# Altium PCB WUT-4-3-3.PcbDoc (part 2 of 2)
Units mil, origin at the board's own origin, x right, y up, seen from the top; angles counter-clockwise.
Board outline 3346.46 x 2204.72 mil, 4 copper layers (Top Layer, GND Plane, 3V3 Plane, Bottom Layer), stack 30.635 mil thick; 173 components, 315 nets, 1031 pads, 178 vias.
Unrouted connection lines stored in the file: 396.
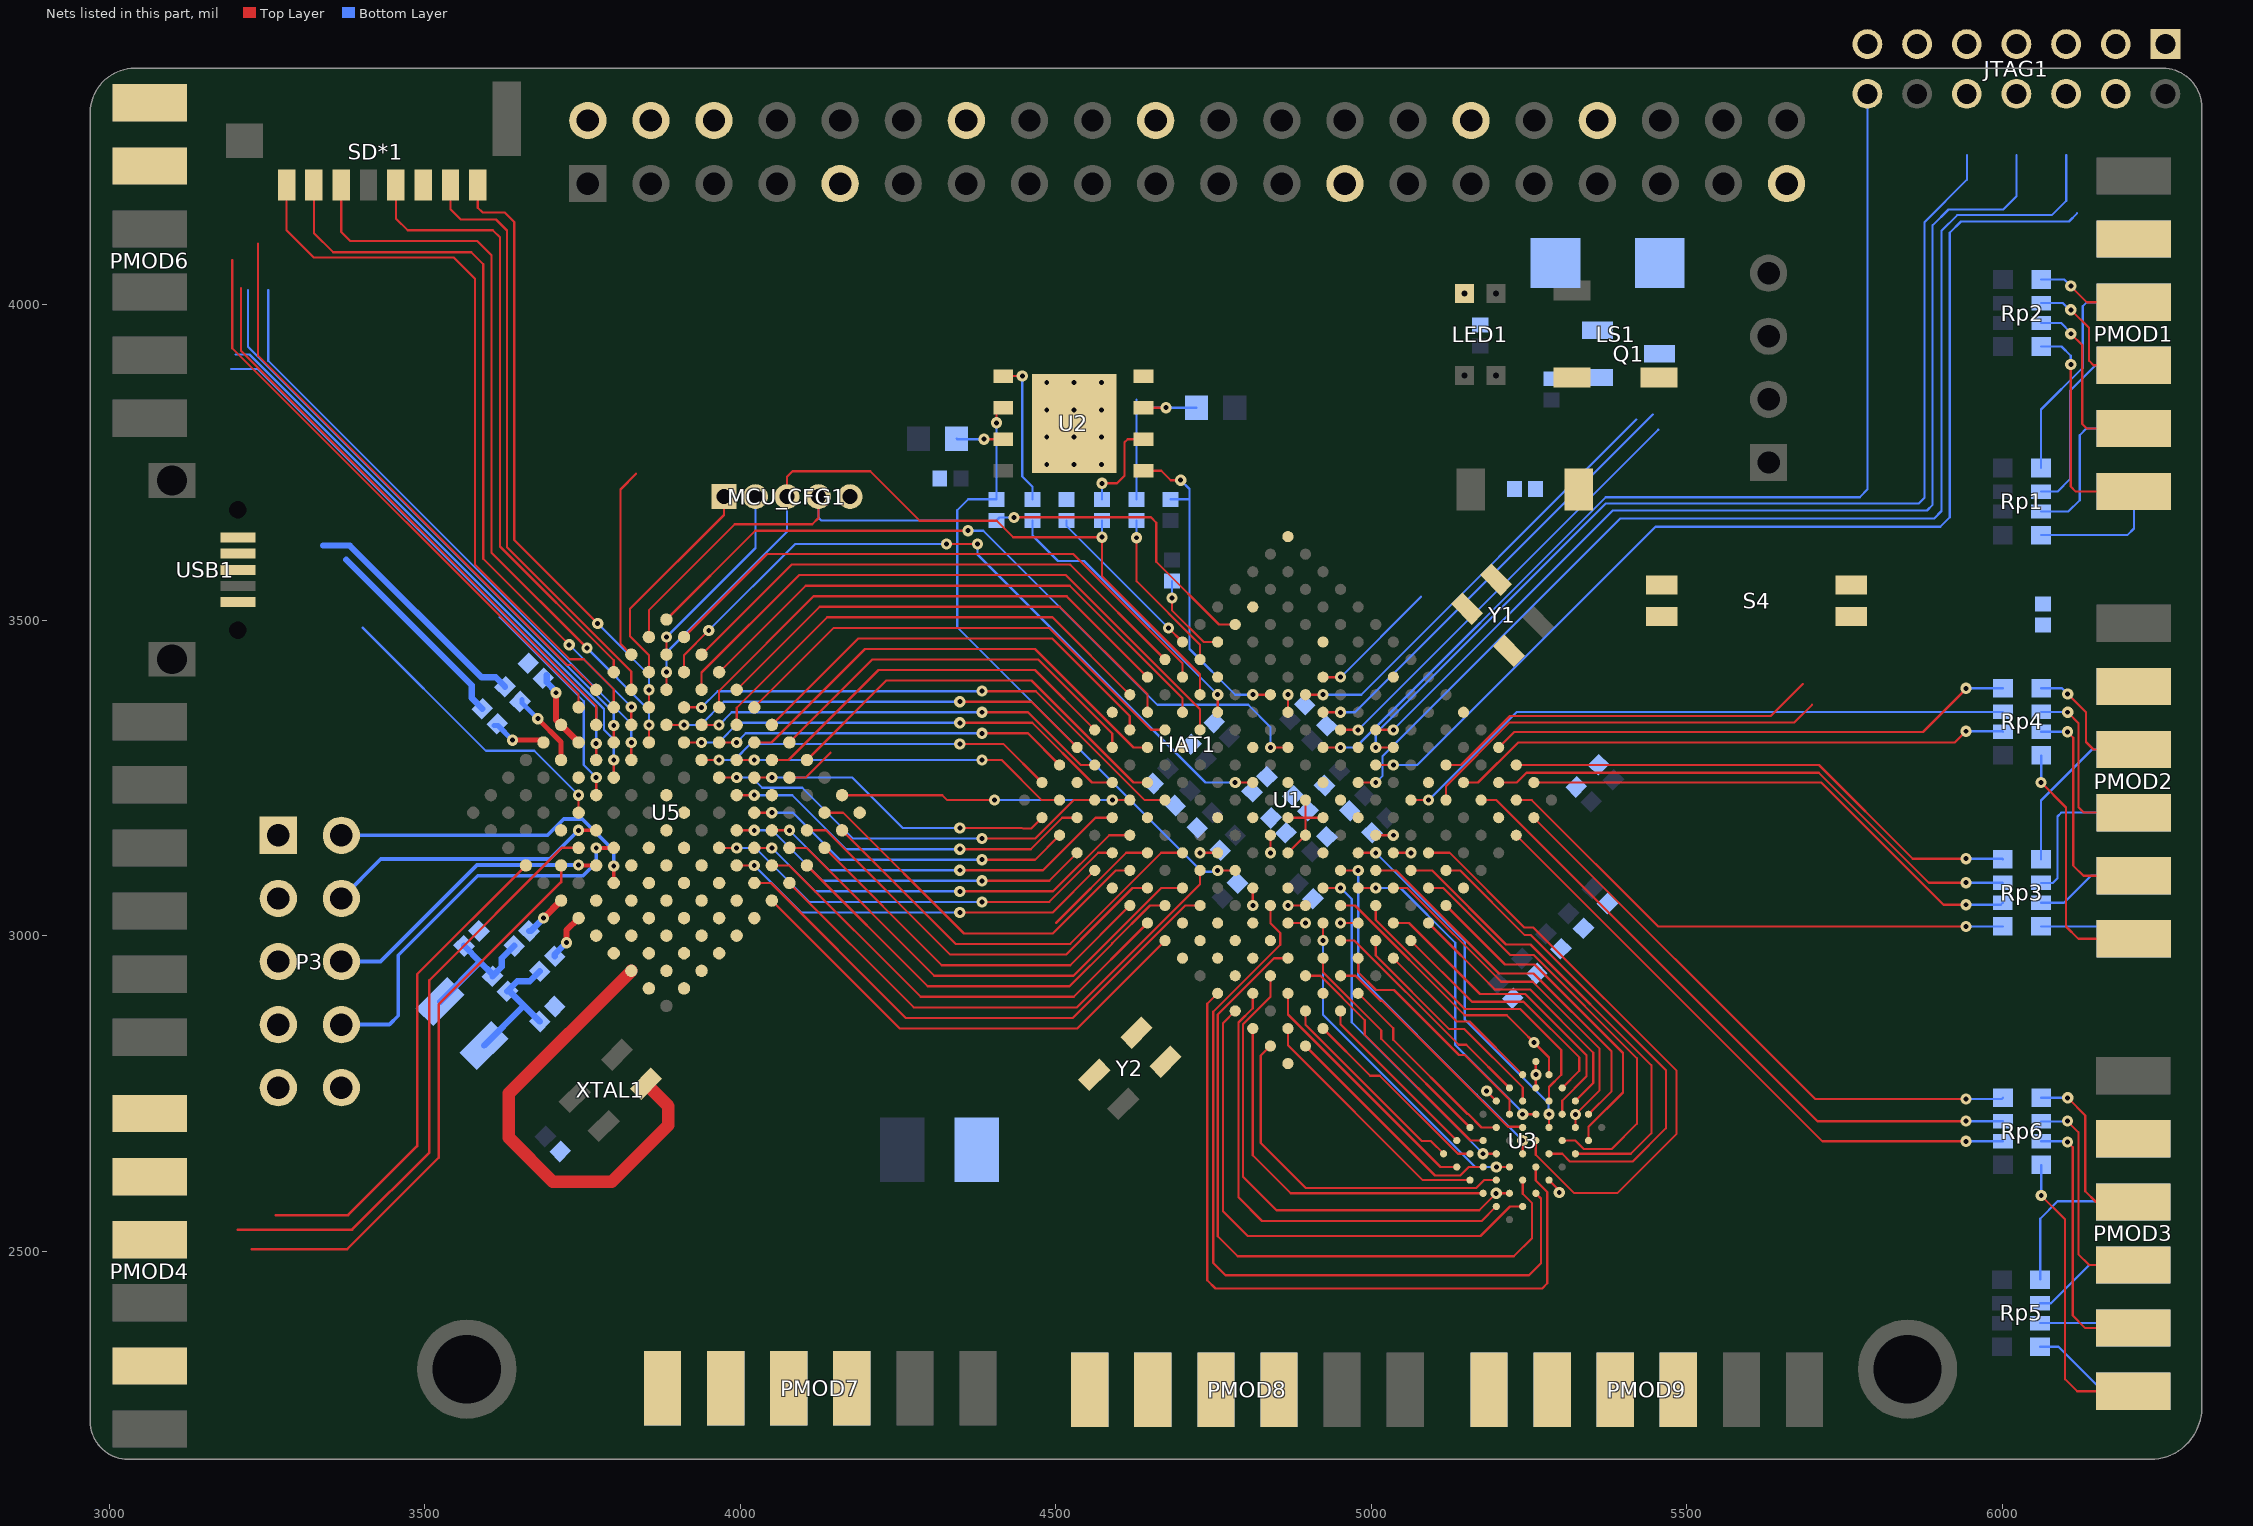
[diagram p4: the nets of this part, all layers, seen from the top]

## Via types
v1: diameter 17.72, hole 7.87, Top Layer to Bottom Layer, tented both sides, 166 vias
v2: diameter 19.68, hole 7.87, Top Layer to Bottom Layer, 12 vias

## Nets (pads, with @x,y where several pads share a name; then routed paths per layer and width w, separated by ;. In a path a pad name is that pad's centre, name@x,y a point inside that pad or via, vN(x,y) a via of type N, cw(c..) or ccw(c..) an arc to the next point about the centre after c; other vN are vias at no path point) (continued)
BANK34_IO9: Rp6.6 U1.P1 | length 977.4
  Top Layer w3.5: U1.P1@5230.07,3159.16 5715.23,2674 v1@5943,2674
  Bottom Layer w3.5: v1@5938,2674.1 v1(5943,2674.1) Rp6.6@6001.49,2674.1
BANK34_IO10: Rp4.6 U1.P4 | length 889
  Top Layer w3.5: U1.P4@5146.55,3242.68 5169.45,3242.68 5233.04,3306.27 5925.27,3306.27 v1(5943,3324)
  Bottom Layer w3.5: v1(5943,3324) 6000.59,3324 Rp4.6@6001.49,3323.1
BANK34_IO11: Rp6.7 U1.P3 | length 1044
  Top Layer w3.5: U1.P3@5174.39,3214.84 5198.64,3214.84 5707.48,2706 v1(5943,2706)
  Bottom Layer w3.5: v1@5937,2706 v1(5943,2706) 6001.09,2706 Rp6.7@6001.49,2705.59
BANK34_IO12: Rp4.7 U1.M5 | length 996.3
  Top Layer w3.5: U1.M5@5063.03,3214.84 v1(5090.87,3214.84)
  Bottom Layer w3.5: v1(5090.87,3214.84) 5230.63,3354.59 Rp4.7@6001.49,3354.59
BANK34_IO13: S4.2 U1.N4 | length 655.8
  Top Layer w3.5: U1.N4@5118.71,3214.84 5118.71,3236.91 5219.83,3338.03 5671.03,3338.03 5699,3366
BANK34_IO14: Rp3.5 U1.R2 | length 854.2
  Top Layer w3.5: U1.R2@5230.07,3214.84 5254.53,3214.84 5454.89,3014.48 v1(5943,3014.48)
  Bottom Layer w3.5: v1(5943,3014.48) 6000.96,3014.48 Rp3.5@6001.18,3014.7
BANK34_IO15: Rp6.8 U1.R1 | length 935.2
  Top Layer w3.5: U1.R1@5257.91,3187 5703.9,2741 v1(5943,2741)
  Bottom Layer w3.5: v1@5937,2741 v1(5943,2741) 5999.5,2741 Rp6.8@6001.49,2743
BANK34_IO16: Rp3.7 U1.R3 | length 877.8
  Top Layer w3.5: U1.R3@5202.23,3242.68 5230.73,3242.68 5246.33,3258.29 5709.71,3258.29 5884,3084 v1(5943,3084)
  Bottom Layer w3.5: v1(5943,3084) 6000.77,3084 Rp3.7@6001.18,3083.59
BANK34_IO17: Rp3.6 U1.T2 | length 824.8
  Top Layer w3.5: U1.T2@5257.91,3242.68 5713.51,3242.68 5907.18,3049 v1(5943,3049)
  Bottom Layer w3.5: v1(5943,3049) 5998.08,3049 Rp3.6@6001.18,3052.1
BANK34_IO18: Rp4.8 U1.T4 | length 837.6
  Top Layer w3.5: U1.T4@5202.23,3298.36 5226.71,3322.84 5874.84,3322.84 v1@5943,3391
  Bottom Layer w3.5: v1(5943,3392) Rp4.8@6001.49,3392
BANK34_IO19: Rp3.8 U1.T3 | length 833
  Top Layer w3.5: U1.T3@5230.07,3270.52 5709.98,3270.52 5858.49,3122 v1(5943,3122)
  Bottom Layer w3.5: v1(5943,3122) 6000.17,3122 Rp3.8@6001.18,3121
BANK34_IO20: S4.1 U1.P5 | length 618.5
  Top Layer w3.5: U1.P5@5118.71,3270.52 5142.42,3270.52 5220.17,3348.27 5633.27,3348.27 5684,3399
BANK35_IO1: U1.B7
BANK35_IO2: U1.A7
BANK35_IO3: U1.B6
BANK35_IO4: U1.B5
BANK35_IO5: U1.C7
BANK35_IO6: U1.C6
BANK35_IO7: U1.D6
BANK35_IO8: U1.D5
BANK35_IO9: U1.E5 | length 27.8
  Top Layer w3.5: U1.E5@4868.16,3019.97 v1(4896,3019.97)
BANK35_IO10: U1.K5 | length 27.8
  Top Layer w3.5: U1.K5@5007.36,3159.16 v1(5035.19,3159.16)
CAN0_RX: PMOD8.12 U5.J9
CAN0_TX: PMOD8.11 U5.K9
CLK_OUT: U1.D13 U5.A11 | length 459.3
  Top Layer w3.5: U5.A11@4161.55,3222.68 4320.32,3222.68 4328.16,3214.84 v1(4403.16,3214.84) ; v1(4589.78,3214.84) U1.D13@4617.61,3214.84
  Bottom Layer w3.5: v1(4403.16,3214.84) v1(4589.78,3214.84)
DIN: MCU_CFG1.3 R16.1 U1.J14 U5.C3 | length 1303.4
  Top Layer w3.5: U5.C3@3883.16,3389.71 v1(3883.16,3417.55) ; MCU_CFG1.3@4074.22,3695.84 4074.22,3727.27 4082.93,3735.98 4206.08,3735.98 4284.62,3657.45 4406.88,3657.45 4432.84,3631.49 v1(4573.4,3631.49) 4573.4,3569.41 4728.97,3413.84 U1.J14@4728.97,3381.87
  Bottom Layer w3.5: v1(3883.16,3417.55) 3883.16,3448.91 4074.22,3639.98 MCU_CFG1.3@4074.22,3695.84 ; v1(4573.4,3631.49) R16.1@4573.4,3658.11
DONE: R8.1 R9.2 U1.H10 U5.B3 | length 1177.9
  Top Layer w3.5: U5.B3@3911,3417.55 3911,3444.61 v1(3950.22,3483.84) ; v1(4327.22,3620.84) v1(4376.22,3620.84) ; v1(4784.65,3242.68) U1.H10@4812.48,3242.68
  Bottom Layer w3.5: v1(3950.22,3483.84) 4087.22,3620.84 v1@4323.16,3620.84 ; v1@4320.16,3623.84 v1@4323.16,3620.84 ; v1@4327.16,3616.84 v1@4323.16,3620.84 ; v1(4327.22,3620.84) v1@4323.16,3620.84 ; v1(4376.22,3620.84) 4376.22,3604 4737.54,3242.68 v1(4784.65,3242.68)
FB_AD0: U1.J15 U5.A2 | length 938.4
  Top Layer w3.5: U5.A2@3911,3473.23 4042.61,3604.84 4528.07,3604.84 4701.13,3431.78 U1.J15@4701.13,3409.71
FB_AD1: U1.J16 U5.A3 | length 856.2
  Top Layer w3.5: U5.A3@3938.84,3445.39 4081.57,3588.12 4523.16,3588.12 4523.16,3587.68 U1.J16@4673.29,3437.55
FB_AD2: U1.H14 U5.A4 | length 887.3
  Top Layer w3.5: U5.A4@3966.68,3417.55 4103.82,3554.69 4522.54,3554.69 4701.13,3376.11 U1.H14@4701.13,3354.03
FB_AD3: U1.H13 U5.B4 | length 1002.2
  Top Layer w3.5: U5.B4@3938.84,3389.71 3938.84,3417 4093.25,3571.41 4516.59,3571.41 4728.97,3359.03 U1.H13@4728.97,3326.19
FB_AD4: U1.E12 U5.C4 | length 844.5
  Top Layer w3.5: U5.C4@3911,3361.87 v1(3938.84,3361.87) ; v1(4383.16,3387.54) 4468.62,3387.54 4641.32,3214.84 U1.E12@4673.29,3214.84
  Bottom Layer w3.5: v1(3938.84,3361.87) 3964.5,3387.54 v1(4383.16,3387.54)
FB_AD5: U1.B15 U5.C7 | length 538
  Top Layer w3.5: U5.C7@3994.52,3278.36 v1(4022.36,3278.35) ; v1(4383.16,3278.35) 4414.65,3278.35 4478.16,3214.84 U1.B15@4506.26,3214.84
  Bottom Layer w3.5: v1(4022.36,3278.35) v1(4383.16,3278.35)
FB_AD6: U1.C14 U5.D7 | length 660.6
  Top Layer w3.5: U5.D7@3966.68,3250.52 v1(3994.52,3250.52) ; v1(4383.16,3153.81) 4467.3,3153.81 4528.33,3214.84 U1.C14@4561.93,3214.84
  Bottom Layer w3.5: v1(3994.52,3250.52) 4018.98,3250.52 4035.13,3234.36 4098.64,3234.36 4179.19,3153.81 v1(4383.16,3153.81)
FB_AD7: U1.E15 U5.A8 | length 636.8
  Top Layer w3.5: U5.A8@4078.03,3306.19 4209.52,3437.68 4472.52,3437.68 4589.77,3320.43 U1.E15@4589.77,3298.36
FB_AD8: U1.E16 U5.B8 | length 610.1
  Top Layer w3.5: U5.B8@4050.19,3278.36 4076.68,3278.36 4219.29,3420.97 4467.16,3420.97 U1.E16@4561.93,3326.19
FB_AD9: U1.A15 U5.C8 | length 494.4
  Top Layer w3.5: U5.C8@4022.36,3250.52 v1(4050.19,3250.52) ; v1(4348.16,3170.53) 4446.26,3170.53 ; 4448.16,3169.84 4461.26,3169.84 U1.A15@4478.42,3187
  Bottom Layer w3.5: v1(4050.19,3250.52) 4177.48,3250.52 4257.47,3170.53 v1(4348.16,3170.53)
FB_AD10: U1.B14 U5.D8 | length 595.7
  Top Layer w3.5: U5.D8@3994.52,3222.68 v1(4022.36,3222.68) ; v1(4348.16,3137.1) 4460.49,3137.1 4510.39,3187 U1.B14@4534.1,3187
  Bottom Layer w3.5: v1(4022.36,3222.68) 4082.48,3222.68 4168.06,3137.1 v1(4348.16,3137.1)
FB_AD11: U1.E13 U5.A9 | length 658.7
  Top Layer w3.5: U5.A9@4105.87,3278.36 4231.77,3404.25 4461.8,3404.25 4623.38,3242.68 U1.E13@4645.45,3242.68
FB_AD12: U1.C11 U5.A12 | length 190.9
  Top Layer w3.5: 4500.61,3020.09 4611.85,3131.32 U1.C11@4645.45,3131.32
FB_AD13: U1.B11 U5.B11 | length 604.7
  Top Layer w3.5: U5.B11@4133.71,3194.84 4163.16,3194.84 4354.63,3003.37 4495.43,3003.37 4595.54,3103.48 U1.B11@4617.61,3103.48
FB_AD14: U1.D10 U5.B12 | length 674.4
  Top Layer w3.5: U5.B12@4161.55,3167 4341.89,2986.66 4523.16,2986.66 4523.16,2986.96 4667.52,3131.32 U1.D10@4701.13,3131.32
FB_AD15: U1.B9 U5.D12 | length 700
  Top Layer w3.5: U5.D12@4105.87,3111.32 4297.4,2919.8 4522.04,2919.8 4589.62,2987.37 4589.62,2987.84 4649.58,3047.81 U1.B9@4673.29,3047.81
FB_AD16: U1.A13 U5.E9 | length 591.1
  Top Layer w3.5: U5.E9@3994.52,3167 v1(4022.36,3167) ; v1(4383.16,3086.95) 4489.72,3086.95 U1.A13@4534.1,3131.32
  Bottom Layer w3.5: v1(4022.36,3167) 4051,3167 4131.05,3086.95 v1(4383.16,3086.95)
FB_AD17: U1.C12 U5.E10 | length 660.6
  Top Layer w3.5: U5.E10@4022.36,3139.16 v1(4050.19,3139.16) ; v1(4348.16,3070.24) 4495.93,3070.24 4584.86,3159.16 U1.C12@4617.61,3159.16
  Bottom Layer w3.5: v1(4050.19,3139.16) 4119.12,3070.24 v1(4348.16,3070.24)
FB_AD18: U1.A9 U5.E11 | length 729.9
  Top Layer w3.5: U5.E11@4050.19,3111.32 4077.91,3111.32 4286.15,2903.08 4528.56,2903.08 U1.A9@4645.45,3019.97
FB_AD19: U1.D9 U5.E12 | length 835.4
  Top Layer w3.5: U5.E12@4078.03,3083.48 4275.15,2886.36 4533.92,2886.36 4728.97,3081.41 U1.D9@4728.97,3103.48
FB_AD20: U1.B12 U5.F9 | length 690.8
  Top Layer w3.5: U5.F9@3966.68,3139.16 v1(3994.52,3139.16) ; v1(4383.16,3053.52) 4489.9,3053.52 4567.7,3131.32 U1.B12@4589.77,3131.32
  Bottom Layer w3.5: v1(3994.52,3139.16) 4023.84,3139.16 4109.48,3053.52 v1(4383.16,3053.52)
FB_AD21: U1.A12 U5.F10 | length 625.9
  Top Layer w3.5: U5.F10@3994.52,3111.32 v1(4022.36,3111.32) ; v1(4348.16,3036.8) 4495.25,3036.8 U1.A12@4561.93,3103.48
  Bottom Layer w3.5: v1(4022.36,3111.32) 4096.87,3036.8 v1(4348.16,3036.8)
FB_AD22: U1.C8 U5.F11 | length 869
  Top Layer w3.5: U5.F11@4022.36,3083.48 4048.84,3083.48 4262.67,2869.65 4527.11,2869.65 4705.26,3047.81 U1.C8@4728.97,3047.81
FB_AD23: U1.A8 U5.F12 | length 764.7
  Top Layer w3.5: U5.F12@4050.19,3055.64 4252.9,2852.93 4534.1,2852.93 U1.A8@4673.29,2992.13
FB_AD24: U1.G16 U5.B6 | length 760.4
  Top Layer w3.5: U5.B6@3994.52,3334.03 3994.52,3361.19 4137.87,3504.54 4494.94,3504.54 U1.G16@4617.61,3381.87
FB_AD25: U1.C16 U5.C6 | length 566.4
  Top Layer w3.5: U5.C6@3966.68,3306.19 v1(3994.52,3306.19) ; v1(4383.16,3320.67) 4456.1,3320.67 U1.C16@4506.26,3270.52
  Bottom Layer w3.5: v1(3994.52,3306.19) 4009,3320.67 v1(4383.16,3320.67)
FB_AD26: U1.B16 U5.D6 | length 575.6
  Top Layer w3.5: U5.D6@3938.84,3278.36 v1(3966.68,3278.35) ; v1(4348.16,3303.96) 4417.14,3303.96 U1.B16@4478.42,3242.68
  Bottom Layer w3.5: v1(3966.68,3278.35) 3990.87,3278.35 4016.47,3303.96 v1(4348.16,3303.96)
FB_AD27: U1.F15 U5.A7 | length 697.2
  Top Layer w3.5: U5.A7@4050.19,3334.03 4187.28,3471.11 4494.77,3471.11 4617.61,3348.27 U1.F15@4617.61,3326.19
FB_AD28: U1.B10 U5.C11 | length 665.2
  Top Layer w3.5: U5.C11@4105.87,3167 4136,3167 4333.06,2969.94 4516.35,2969.94 4563.16,3016.76 4563.16,3017.06 4621.75,3075.64 U1.B10@4645.45,3075.64
FB_AD29: U1.A10 U5.C12 | length 600.1
  Top Layer w3.5: U5.C12@4133.71,3139.16 4319.65,2953.23 4523.03,2953.23 U1.A10@4617.61,3047.81
FB_AD30: U1.A14 U5.D9 | length 530.8
  Top Layer w3.5: U5.D9@4022.36,3194.84 v1(4050.19,3194.84) ; v1(4383.16,3120.38) 4467.48,3120.38 U1.A14@4506.26,3159.16
  Bottom Layer w3.5: v1(4050.19,3194.84) 4083.85,3194.84 4158.31,3120.38 v1(4383.16,3120.38)
FB_AD31: U1.C13 U5.D10 | length 600.3
  Top Layer w3.5: U5.D10@4050.19,3167 v1(4078.03,3167) ; v1(4348.16,3103.67) 4479.83,3103.67 4563.16,3187 U1.C13@4589.77,3187
  Bottom Layer w3.5: v1(4078.03,3167) 4141.37,3103.67 v1(4348.16,3103.67)
FB_ALE: U1.G15 U5.A5 | length 791.4
  Top Layer w3.5: U5.A5@3994.52,3389.71 4126.07,3521.26 4506.74,3521.26 4645.45,3382.55 U1.G15@4645.45,3354.03
FB_BE7_0: U1.H16 U5.B5 | length 820.9
  Top Layer w3.5: U5.B5@3966.68,3361.87 3966.68,3388.36 4116.3,3537.98 4518.16,3537.98 4518.16,3537 U1.H16@4645.45,3409.71
FB_BE15_8: U1.D15 U5.C5 | length 666
  Top Layer w3.5: U5.C5@3938.84,3334.03 v1(3966.68,3334.03) ; v1(4383.16,3354.11) 4456.27,3354.11 4539.86,3270.52 U1.D15@4561.93,3270.52
  Bottom Layer w3.5: v1(3966.68,3334.03) 3986.75,3354.11 v1(4383.16,3354.11)
FB_BE23_16: U1.G14 U5.A6 | length 770.1
  Top Layer w3.5: U5.A6@4022.36,3361.87 4148.31,3487.83 4489.58,3487.83 4651.22,3326.19 U1.G14@4673.29,3326.19
FB_BE31_24: U1.D14 U5.D5 | length 730.9
  Top Layer w3.5: U5.D5@3911,3306.19 v1(3938.84,3306.19) ; v1(4348.16,3337.39) 4462.99,3337.39 4557.7,3242.68 U1.D14@4589.77,3242.68
  Bottom Layer w3.5: v1(3938.84,3306.19) 3965.87,3306.19 3997.07,3337.39 v1(4348.16,3337.39)
FB_CS0: U1.D16 U5.D4 | length 696.2
  Top Layer w3.5: U5.D4@3883.16,3334.03 v1(3911,3334.03) ; v1(4348.16,3370.82) 4461.63,3370.82 U1.D16@4534.1,3298.36
  Bottom Layer w3.5: v1(3911,3334.03) 3937.36,3334.03 3974.14,3370.82 v1(4348.16,3370.82)
FB_OE: U1.C9 U5.D11 | length 764.7
  Top Layer w3.5: U5.D11@4078.03,3139.16 4105.07,3139.16 4307.72,2936.51 4528.39,2936.51 4667.52,3075.64 U1.C9@4701.13,3075.64
FB_RW: U1.F14 U5.B7 | length 749.1
  Top Layer w3.5: U5.B7@4022.36,3306.19 4049.52,3306.19 4197.72,3454.4 4467.33,3454.4 4623.38,3298.36 U1.F14@4645.45,3298.36
FPGA_INIT: R11.1 R12.2 U1.K10 U5.A1 | length 1212.4
  Top Layer w3.5: U5.A1@3883.16,3501.07 4023.93,3641.84 v1(4361.22,3641.84) 4361.22,3636.84 v1@4363.22,3634.84 ; v1(4840.32,3298.35) U1.K10@4868.16,3298.36
  Bottom Layer w3.5: v1(4361.22,3641.84) 4385.22,3641.84 4661.22,3365.84 4805.22,3365.84 4840.32,3330.74 v1(4840.32,3298.35)
FTM1_QDA: PMOD7.3 U5.K8
FTM1_QDB: PMOD7.9 U5.L8
FTM2_QDA: PMOD7.4 U5.M9
FTM2_QDB: PMOD7.10 U5.L9
GCLK: U1.N11 Y1.3 | length 207.9
  Top Layer w3.5: U1.N11@4923.84,3409.71 v1(4951.68,3409.71)
  Bottom Layer w3.5: v1(4951.68,3409.71) 5078.97,3537
GND: C1.2 C2.1 C3.1 C4.1 C5.1 C6.1 C7.2 C8.1 C9.1 C10.2 C11.1 C12.1 C13.1 C14.1 C15.1 C17.1 C18.1 C19.1 C20.1 C21.1 C22.1 C23.1 C24.1 C25.1 C26.2 C27.1 C28.1 C29.1 C30.1 C31.2 C32.1 C33.1 C34.1 C35.1 C36.1 C37.1 C38.1 C39.1 C40.1 C41.1 C42.1 C43.1 C44.1 C45.1 C46.1 C47.1 C48.1 C49.1 C50.1 C51.1 C52.1 C53.2 C54.2 C55.1 C56.1 C57.1 C58.2 C59.1 C60.1 C61.1 C62.1 C63.1 C64.2 C65.2 C66.2 C67.2 C68.1 C69.1 C70.1 C71.1 C72.1 C73.1 HAT1.6 HAT1.9 HAT1.14 HAT1.20 HAT1.25 HAT1.30 HAT1.34 HAT1.39 JTAG1.1 JTAG1.3 JTAG1.5 JTAG1.7 JTAG1.9 JTAG1.11 JTAG1.13 L1.2 L2.2 L6.1 MCU_CFG1.5 P3.3 P3.5 P3.7 P3.9 PMOD1.2 PMOD1.8 PMOD2.2 PMOD2.8 PMOD3.2 PMOD3.8 PMOD4.2 Q1.2 Q2.2 R3.1 R5.1 R7.1 R30.2 R31.2 R32.2 R33.2 R34.2 R38.2 R40.1 S1.1 S3.2 S6.1 SD*1.6 U1.A1 U1.A11 U1.B8 U1.C5 U1.C15 U1.D2 U1.D12 U1.E9 U1.F6 U1.F10 U1.F16 U1.G3 U1.G9 U1.G13 U1.H6 U1.J9 U1.J11 U1.K4 U1.K6 U1.K7 U1.K8 U1.K14 U1.L1 U1.L11 U1.M8 U1.N5 U1.N15 U1.P2 U1.P12 U1.R9 U1.T6 U1.T16 U2.4 U2.9 U3.A1 U3.B2 U3.D1 U3.E6 U5.F6 U5.F7 U5.G7 U5.G8 U5.H3 U5.H7 U5.H8 U5.M10 USB1.5 XTAL1.2 Y1.2 Y2.2 | length 949.5
  Top Layer w3.5: v1(4728.97,3131.32) U1.E9@4756.81,3131.32 ; U1.L11@4868.16,3354.03 v1(4868.16,3381.87) ; v1(4951.68,3019.97) U1.G3@4979.52,3019.97 ; U1.K4@5035.19,3131.32 v1(5063.03,3131.32) ; v1@5181.21,2748.85 v1@5181.21,2751.69 ; v1(5183.22,2753.84) 5183.22,2753.08 U3.D1@5198.47,2737.84 ; U3.B2@5261.1,2758.72 U3.A1@5261.1,2800.48 ; U3.E6@5281.98,2612.56 5298.71,2595.84 5298.22,2595.36 v1(5298.22,2592.84)
  Top Layer w20: U5.M10@3827.48,2944.29 3633.22,2750.03 3633.22,2679.84 3703.22,2609.84 3796.22,2609.84 3886.22,2699.84 3886.22,2729.66 XTAL1.2@3850.62,2765.27
  other v1: 5261.1,2779.6
  other v2: 4485.92,3746.88 4529.22,3746.88 4572.53,3746.88 4485.92,3790.19 4529.22,3790.19 4572.53,3790.19 4485.92,3833.49 4529.22,3833.49 4572.53,3833.49 4485.92,3876.8 4529.22,3876.8 4572.53,3876.8
JTAG_TCK: P3.4 U5.J5 | length 448.5
  Top Layer w6: v1(3743.97,3167) U5.J5@3771.81,3167
  Bottom Layer w6: P3.4@3368,3059 3430.34,3121.34 3698.31,3121.34 v1(3743.97,3167)
JTAG_TDI: P3.8 U5.J6 | length 617.3
  Top Layer w6: v1(3771.9,3138.84) 3772.22,3139.16 U5.J6@3799.64,3139.16
  Bottom Layer w6: P3.8@3368,2859 3444,2859 3458,2873 3458,2969 3583.98,3094.98 3750.95,3094.98 3771.9,3115.93 v1(3771.9,3138.84)
JTAG_TDO: P3.6 U5.K6 | length 467.3
  Top Layer w6: v1(3743.97,3111.84) 3744.48,3111.32 U5.K6@3771.81,3111.32
  Bottom Layer w6: P3.6@3368,2959 3430,2959 3582.84,3111.84 v1(3743.97,3111.84)
JTAG_TMS: P3.2 U5.K7 | length 514.7
  Top Layer w6: U5.K7@3799.64,3083.48 v1(3799.64,3110.44)
  Bottom Layer w6: P3.2@3368,3159 3694.36,3159 3720.36,3185 3749.81,3185 3799.64,3135.16 v1(3799.64,3110.44)
LPTMR0: PMOD7.11 U5.M11
MODE0: R2.1 R3.2 U1.M9 | length 700.5
  Top Layer w3.5: U1.M9@4951.68,3326.19 v1(4979.52,3326.19)
  Bottom Layer w3.5: v1(4979.52,3326.19) 5455.16,3801.84
MODE1: R4.1 R5.2 U1.M10 | length 718.1
  Top Layer w3.5: U1.M10@4923.84,3354.03 v1(4951.68,3354.03)
  Bottom Layer w3.5: v1(4951.68,3354.03) 4974.45,3354.03 5446.45,3826.04
MODE2: R6.1 R7.2 U1.M11 | length 705.5
  Top Layer w3.5: U1.M11@4896,3381.87 v1(4923.84,3381.87)
  Bottom Layer w3.5: v1(4923.84,3381.87) 4984.26,3381.87 5420.69,3818.31
n_RST: C71.2 P3.10 R41.1 S6.2 U5.L12
NetC3_2: C3.2 FB1.2 Y1.4
NetC5_2: C5.2 FB2.2 Y2.4
NetC10_1: C10.1 C16.1 L5.2 U1.G8 | length 27.8
  Top Layer w3.5: v1(4840.32,3131.32) U1.G8@4840.32,3159.16
NetC64_1: C64.1 R35.2 R37.2 Y3.2 | length 225.5
  Bottom Layer w10: Y3.2@3594.02,2825.8 3657.22,2889 3657.22,2889.28 ; R35.2@3682.39,2943.77 3666.47,2927.84 3646.89,2927.84 R37.2@3631.06,2912.01 3634.49,2912.01 3657.22,2889.28 ; C64.1@3682.49,2864.01 3657.22,2889.28
NetC65_1: C65.1 R36.2 R37.1 Y3.1 | length 218.7
  Bottom Layer w10: Y3.1@3524.43,2895.4 3587.22,2958.19 3587.22,2958.94 ; C65.1@3562.39,2983.77 3587.22,2958.94 ; R36.2@3641.84,2983.77 3622.22,2964.15 3622.22,2950.5 R37.1@3607.39,2935.67 3607.39,2938.77 3587.22,2958.94
NetD1_1: D1.1 USB1.1
NetD2_1: D2.1 LS1.2 Q1.3
NetD2_2: D2.2 LS1.1 R28.1
NetD3_1: D3.1 LS2.2 Q2.3
NetD4_2: D4.2 P3.1
NetL1_1: L1.1 R9.1
NetL2_1: L2.1 R12.1
NetL3_2: L3.2 R32.1
NetL4_2: L4.2 R33.1
NetLED1_2: LED1.2 R29.2
NetPMOD1_3: PMOD1.3 Rp2.1 | length 161.8
  Top Layer w3.5: v1(6109,4029.46) 6134.46,4004 PMOD1.3@6209,4004
  Bottom Layer w3.5: Rp2.1@6062.12,4040 6098.47,4040 v1(6109,4029.46)
NetPMOD1_4: PMOD1.4 Rp2.2 | length 218.2
  Top Layer w3.5: v1(6109,3992) 6138,3963 6138,3911 6145,3904 PMOD1.4@6209,3904
  Bottom Layer w3.5: Rp2.2@6062.12,4002.59 6096.41,4002.59 6107,3992 v1(6109,3992)
NetPMOD1_5: PMOD1.5 Rp2.3 | length 290.3
  Top Layer w3.5: v1(6109,3954) 6127,3936 6127,3811 6134,3804 PMOD1.5@6209,3804
  Bottom Layer w3.5: Rp2.3@6062.12,3971.1 6093.65,3971.1 6109,3955.74 v1(6109,3954)
NetPMOD1_6: PMOD1.6 Rp2.4 | length 363.6
  Top Layer w3.5: v1(6109,3905) 6109,3711.74 6117,3703.74 6208.74,3703.74 PMOD1.6@6209,3704
  Bottom Layer w3.5: Rp2.4@6062.12,3933.7 6094.3,3933.7 6109,3919 v1(6109,3905)
NetPMOD1_9: PMOD1.9 Rp1.1 | length 367.5
  Bottom Layer w3.5: Rp1.1@6061.81,3741.15 6061.81,3833.81 6128,3900 6128,3997.54 6134.46,4004 PMOD1.9@6209,4004
NetPMOD1_10: PMOD1.10 Rp1.2 | length 312.2
  Bottom Layer w3.5: Rp1.2@6061.81,3703.74 6087.74,3703.74 6108,3724 6108,3864 6148,3904 PMOD1.10@6209,3904
NetPMOD1_11: PMOD1.11 Rp1.3 | length 262
  Bottom Layer w3.5: Rp1.3@6061.81,3672.25 6105.13,3672.25 6123,3690.12 6123,3793 6134,3804 PMOD1.11@6209,3804
NetPMOD1_12: PMOD1.12 Rp1.4 | length 210.2
  Bottom Layer w3.5: Rp1.4@6061.81,3634.85 6198.59,3634.85 6209,3645.26 PMOD1.12@6209,3704
NetPMOD2_3: PMOD2.3 Rp4.1 | length 214.6
  Top Layer w3.5: v1(6104,3383) 6133,3354 6133,3307 6145,3295 PMOD2.3@6209,3295
  Bottom Layer w3.5: Rp4.1@6062.12,3392 6095,3392 v1(6104,3383)
NetPMOD2_4: PMOD2.4 Rp4.2 | length 291
  Top Layer w3.5: v1(6104,3354.11) 6121,3337.11 6121,3204.01 6130.01,3195 PMOD2.4@6209,3195
  Bottom Layer w3.5: Rp4.2@6062.12,3354.59 6103.51,3354.59 v1(6104,3354.11)
NetPMOD2_5: PMOD2.5 Rp4.3 | length 360
  Top Layer w3.5: v1(6103.51,3323.1) 6113,3313.61 6113,3111 6129,3095 PMOD2.5@6209,3095
  Bottom Layer w3.5: Rp4.3@6062.12,3323.1 v1(6103.51,3323.1)
NetPMOD2_6: PMOD2.6 Rp4.4 | length 403.3
  Top Layer w3.5: v1(6061.81,3243) 6101.52,3203.29 6101.52,3014.48 6121,2995 PMOD2.6@6209,2995
  Bottom Layer w3.5: v1(6061.81,3243) 6062.12,3243.32 Rp4.4@6062.12,3285.7
NetPMOD2_9: PMOD2.9 Rp3.1 | length 273.9
  Bottom Layer w3.5: Rp3.1@6061.81,3121 6061.81,3214.32 6142.48,3295 PMOD2.9@6209,3295
NetPMOD2_10: PMOD2.10 Rp3.2 | length 250.7
  Bottom Layer w3.5: Rp3.2@6061.81,3083.59 6080.59,3083.59 6088,3091 6088,3189 6094,3195 PMOD2.10@6209,3195
NetPMOD2_11: PMOD2.11 Rp3.3 | length 165
  Bottom Layer w3.5: Rp3.3@6061.81,3052.1 6098.1,3052.1 6141,3095 PMOD2.11@6209,3095
NetPMOD2_12: PMOD2.12 Rp3.4 | length 155.4
  Bottom Layer w3.5: Rp3.4@6061.81,3014.7 6189.3,3014.7 PMOD2.12@6209,2995
NetPMOD3_3: PMOD3.3 Rp6.1 | length 284.5
  Top Layer w3.5: v1(6104,2743) 6132,2715 6132,2595 6149,2578 PMOD3.3@6208,2578
  Bottom Layer w3.5: Rp6.1@6062.12,2743 v1(6104,2743)
NetPMOD3_4: PMOD3.4 Rp6.2 | length 353.8
  Top Layer w3.5: v1(6103.51,2706) 6121,2688.51 6121,2495 6138,2478 PMOD3.4@6208,2478
  Bottom Layer w3.5: Rp6.2@6062.12,2705.59 6103.11,2705.59 v1(6103.51,2706)
NetPMOD3_5: PMOD3.5 Rp6.3 | length 424.6
  Top Layer w3.5: v1(6103.51,2673) 6112,2664.51 6112,2398 6132,2378 PMOD3.5@6208,2378
  Bottom Layer w3.5: Rp6.3@6062.12,2674.1 6102.41,2674.1 v1(6103.51,2673)
NetPMOD3_6: PMOD3.6 Rp6.4 | length 471.3
  Top Layer w3.5: v1(6062.12,2588) 6100,2550.12 6100,2297 6119,2278 PMOD3.6@6208,2278
  Bottom Layer w3.5: v1(6062.12,2588) Rp6.4@6062.12,2636.7
NetPMOD3_9: PMOD3.9 Rp5.1 | length 256
  Bottom Layer w3.5: Rp5.1@6060.44,2454.85 6060.44,2551.44 6088,2579 6207,2579 PMOD3.9@6208,2578
NetPMOD3_10: PMOD3.10 Rp5.2 | length 172.6
  Bottom Layer w3.5: Rp5.2@6060.44,2417.44 6077.44,2417.44 6138,2478 PMOD3.10@6208,2478
NetPMOD3_11: PMOD3.11 Rp5.3 | length 150.9
  Bottom Layer w3.5: Rp5.3@6060.44,2385.95 6200.05,2385.95 PMOD3.11@6208,2378
NetPMOD3_12: PMOD3.12 Rp5.4 | length 176.8
  Bottom Layer w3.5: Rp5.4@6060.44,2348.55 6089.45,2348.55 6160,2278 PMOD3.12@6208,2278
NetQ1_1: Q1.1 R24.2
NetQ2_1: Q2.1 R25.2
NetR1_2: R1.2 U1.E7 | length 27.8
  Top Layer w3.5: v1(4812.48,3047.81) U1.E7@4812.48,3075.64
NetR16_2: R16.2 U2.2 | length 151.5
  Top Layer w3.5: v1(4573.4,3717.01) 4597.41,3717.01 4609.22,3728.83 4609.22,3781.84 4614.22,3786.84 U2.2@4639.46,3786.84
  Bottom Layer w3.5: R16.2@4573.4,3691.57 v1(4573.4,3717.01)
NetR17_2: R17.2 R18.1 U2.3 | length 290.4
  Top Layer w3.5: U2.3@4639.46,3836.84 v1(4674.75,3836.84)
  Bottom Layer w3.5: R17.2@4628.4,3691.57 4628.4,3849.61 ; 4628.4,3831.61 4633.63,3836.84 v1(4674.75,3836.84) R18.1@4723.27,3836.84
NetR19_1: R19.1 U1.L15 | length 142.2
  Top Layer w3.5: v1(4684.22,3535.31) 4684.22,3515.84 4734.67,3465.39 U1.L15@4756.81,3465.39
  Bottom Layer w3.5: v1@4682.22,3536.37 4683.28,3535.31 v1(4684.22,3535.31) R19.1@4684.22,3562.11
NetR20_1: R20.1 U1.M15 | length 487
  Top Layer w3.5: v1@4434.22,3663.03 4651.04,3663.03 4659.59,3654.48 4659.59,3592.48 4758.84,3493.23 U1.M15@4784.64,3493.23
  Bottom Layer w3.5: R20.1@4406.22,3658.11 4410.96,3662.84 v1(4434.22,3662.84)
NetR21_1: R21.1 R22.1 U2.7 | length 74.3
  Top Layer w3.5: v1(4386.22,3786.84) U2.7@4417.02,3786.84
  Bottom Layer w3.5: R21.1@4343.17,3787.84 4344.17,3786.84 v1(4386.22,3786.84)
NetR23_1: R23.1 U2.5 | length 232.2
  Top Layer w3.5: U2.5@4417.02,3886.84 v1(4447.22,3886.84)
  Bottom Layer w3.5: v1(4447.22,3886.84) 4447.22,3727.84 4463.4,3711.66 R23.1@4463.4,3691.57
NetR30_1: R30.1 S4.3 S4.4
NetR31_1: R31.1 S5.3 S5.4
NetR34_1: R34.1 S2.2
NetR40_2: R40.2 U5.G1 U5.G2 | length 127.8
  Top Layer w10: v1(3708,3385) 3708,3342.16 U5.G1@3716.13,3334.03 U5.G2@3743.97,3306.19
  Bottom Layer w10: R40.2@3693.34,3413.01 3693.34,3401.66 3708,3387 v1(3708,3385)
PROG: JTAG1.14 R10.1 S1.2 U1.L9 U5.C1 | length 1963.2
  Top Layer w3.5: U5.C1@3827.48,3445.39 3810.22,3462.65 3810.22,3707.24 3835.02,3732.04 ; U1.L9@4923.84,3298.36 v1(4951.68,3298.35)
  Bottom Layer w3.5: v1(4951.68,3298.35) 4975.38,3298.35 5372.03,3695 5774.34,3695 5786.56,3707.22 JTAG1.14@5786.56,4334.26
PTA4: R39.1 U5.L7
PTA5: PMOD7.5 U5.M8
PTA6: S5.1 U5.J7
PTA7: S5.2 U5.J8
PTA14: PMOD7.6 U5.L10
PTA15: PMOD7.12 U5.L11
PTA16: PMOD8.4 U5.K10
PTA17: PMOD8.9 U5.K11
PTA24: PMOD8.3 U5.K12
PTA25: PMOD8.10 U5.J12
PTA26: PMOD8.5 U5.J11
PTA27: PMOD8.6 U5.J10
PTA28: PMOD9.3 U5.H12
PTA29: PMOD9.9 U5.H11
PTB0: PMOD9.4 U5.H10
PTB1: PMOD9.10 U5.H9
PTB2: PMOD9.5 U5.G12
PTB3: PMOD9.11 U5.G11
PTB4: PMOD9.6 U5.G10
PTB5: PMOD9.12 U5.G9
PTD8: L3.1 U5.C9
PTD9: L4.1 U5.B9 | length 81.4
  Top Layer w3.5: U5.B9@4078.03,3250.52 4103.84,3250.52 4143.16,3289.84
PTE0: SD*1.8 U5.D3 | length 960.9
  Top Layer w3.5: SD*1.8@3584.22,4190 3584.22,4153.78 3592,4146 3626.89,4146 3641.84,4131.04 3641.84,3627.22 v1(3774.22,3494.84) ; U5.D3@3855.32,3361.87 v1(3855.32,3389.71)
  Bottom Layer w3.5: v1(3774.22,3494.84) 3855.32,3413.74 v1(3855.32,3389.71)
PTE1: SD*1.7 U5.D2 | length 951.8
  Top Layer w3.5: SD*1.7@3540.92,4190 3540.92,4151.08 3557,4135 3613,4135 3630.36,4117.64 3630.36,3615.7 3827.48,3418.58 U5.D2@3827.48,3389.71
PTE2: SD*1.5 U5.D1 | length 994.6
  Top Layer w3.5: SD*1.5@3454.3,4190 3454.3,4136.7 3473,4118 3608,4118 3619.22,4106.78 3619.22,3616.94 3799.64,3436.52 U5.D1@3799.64,3417.55
PTE3: SD*1.3 U5.E4 | length 1203.8
  Top Layer w3.5: SD*1.3@3367.69,4190 3367.69,4115.31 3382,4101 3583.45,4101 3606,4078.45 3606,3607.06 v1(3757.22,3455.84) ; U5.E4@3855.32,3306.19 v1(3855.32,3334.03)
  Bottom Layer w3.5: v1(3757.22,3455.84) 3855.32,3357.74 v1(3855.32,3334.03)
PTE4: SD*1.2 U5.E3 | length 1192.6
  Top Layer w3.5: SD*1.2@3324.38,4190 3324.38,4113.62 3355,4083 3574,4083 3592.88,4064.12 3592.88,3597.18 v1(3729.06,3461) ; U5.E3@3827.48,3334.03 v1(3827.48,3362.58)
  Bottom Layer w3.5: v1(3729.06,3461) v1(3827.48,3362.58)
PTE5: SD*1.1 U5.E2 | length 1185.9
  Top Layer w3.5: SD*1.1@3281.07,4190 3281.07,4117.93 3324,4075 3546,4075 3579.56,4041.44 3579.56,3588.43 3729.99,3438 3752,3438 3799.64,3390.36 U5.E2@3799.64,3361.87
PTE6: U5.E1 | length 933
  Top Layer w3.5: 3236,4097 3236,3919 3726,3429 3732.52,3429 U5.E1@3771.81,3389.71
PTE7: U5.F4 | length 983
  Top Layer w3.5: U5.F4@3827.48,3278.36 v1(3827.48,3306.19)
  Bottom Layer w3.5: 3252,4023 3252,3911.24 3827.48,3335.76 v1(3827.48,3306.19)
PTE8: PMOD6.5 U5.F3 | length 956.9
  Top Layer w3.5: U5.F3@3799.64,3306.19 v1(3799.64,3333.01)
  Bottom Layer w3.5: 3220,4023 3220,3933.34 3799.64,3353.69 v1(3799.64,3333.01)
PTE9: PMOD6.6 U5.F2 | length 925.1
  Top Layer w3.5: 3209,4026 3209,3926.98 3771.81,3364.17 U5.F2@3771.81,3334.03
PTE10: U5.F1 | length 936.5
  Top Layer w3.5: 3195,4071 3195,3931.08 3743.97,3382.11 U5.F1@3743.97,3361.87
PTE11: U5.G4 | length 932
  Top Layer w3.5: U5.G4@3799.64,3250.52 v1(3799.64,3278.36)
  Bottom Layer w3.5: 3200,3921 3222.44,3921 3784.04,3359.4 3784.04,3326.54 3799.64,3310.93 v1(3799.64,3278.36)
PTE12: U5.G3 | length 884.3
  Top Layer w3.5: U5.G3@3771.81,3278.36 v1(3771.81,3304.69)
  Bottom Layer w3.5: 3193,3898 3235.54,3898 3771.81,3361.73 v1(3771.81,3304.69)
PTE24: PMOD4.4 U5.M4 | length 785.7
  Top Layer w4: 3264,2557 3378.61,2557 3488,2666.39 3488,2938.87 U5.M4@3660.45,3111.32
PTE25: PMOD4.5 U5.K5 | length 950.6
  Top Layer w4: 3204,2534 3385,2534 3507.34,2656.34 3507.34,2929.34 3717.16,3139.16 U5.K5@3743.97,3139.16
PTE26: R25.1 U5.K4
PTE27: S3.1 U5.J4 | length 480.4
  Top Layer w3.5: U5.J4@3743.97,3194.84 v1(3743.97,3222.68)
  Bottom Layer w3.5: 3401.5,3488.5 3597,3293 3673.64,3293 v1(3743.97,3222.68)
PTE28: U5.H4 | length 345.1
  Top Layer w3.5: U5.H4@3771.81,3222.68 v1(3771.81,3250.52)
  Bottom Layer w3.5: 3619.1,3504.54 3752,3371.64 3752,3270.32 v1(3771.81,3250.52)
QSPI_CS: R15.1 U1.L12 U2.1 | length 526.5
  Top Layer w3.5: U2.1@4639.46,3736.84 4667.34,3736.84 4682.34,3721.84 v1(4698.22,3721.84) ; v1(4812.48,3381.87) U1.L12@4840.32,3381.87
  Bottom Layer w3.5: R15.1@4682.22,3691.57 4711.97,3691.57 4712.23,3691.84 ; v1(4698.22,3721.84) 4712.23,3707.83 4712.23,3691.84 ; v1(4812.48,3381.87) 4784.64,3381.87 4712.23,3454.28 4712.23,3691.84
QSPI_DQ0: R23.2 U1.J13 | length 449.6
  Top Layer w3.5: U1.J13@4756.81,3354.03 v1(4756.81,3381.87)
  Bottom Layer w3.5: R23.2@4463.4,3658.11 4463.4,3634.28 4503.84,3593.84 4544.84,3593.84 v1(4756.81,3381.87)
QSPI_DQ2: R17.1 U1.K15 | length 262.2
  Top Layer w3.5: v1(4628.4,3630.66) 4628.4,3561.66 4728.97,3461.1 U1.K15@4728.97,3437.55
  Bottom Layer w3.5: v1(4628.4,3630.66) R17.1@4628.4,3658.11
QSPI_DQ3: R22.2 U1.K16 | length 268.8
  Top Layer w3.5: v1(4678.68,3487.84) U1.K16@4701.13,3465.39
  Bottom Layer w3.5: R22.2@4517.4,3658.11 4517.4,3649.12 v1(4678.68,3487.84)
QSPI_SCK: MCU_CFG1.4 R20.2 U1.E8 U2.6 U5.B1 | length 1657.5
  Top Layer w3.5: U5.B1@3855.32,3473.23 3855.32,3515.94 3991.59,3652.2 4114.48,3652.2 4124.22,3661.94 MCU_CFG1.4@4124.22,3695.84 ; v1(4406.22,3812.84) U2.6@4406.22,3830.84 ; v1(4756.82,3103.5) U1.E8@4784.64,3103.48
  Bottom Layer w3.5: MCU_CFG1.4@4124.22,3695.84 4124.22,3661.94 4128.33,3657.84 4344.22,3657.84 ; v1(4406.22,3812.84) R20.2@4406.22,3691.57 4361.51,3691.57 4344.22,3674.28 4344.22,3657.84 ; v1(4756.82,3103.5) 4754.46,3101.13 4731.87,3101.13 4344.22,3488.78 4344.22,3657.84
RTC_WAKE: PMOD4.6 U5.L5 | length 899.8
  Top Layer w4: 3226,2503 3377,2503 3522,2648 3522,2890.68 3716.13,3084.81 U5.L5@3716.13,3111.32
RTCX1: R36.1 U5.M6 | length 70.6
  Top Layer w10: v1(3688.29,3027.81) U5.M6@3716.13,3055.64
  Bottom Layer w10: R36.1@3665.51,3007.43 3667.91,3007.43 v1(3688.29,3027.81)
RTCX2: R35.1 U5.M7 | length 76.1
  Top Layer w10: v1(3724.66,2988.84) 3724.66,3008.5 U5.M7@3743.97,3027.81
  Bottom Layer w10: R35.1@3706.06,2967.43 3706.06,2970.23 v1(3724.66,2988.84)
SPI2_PCS0: MCU_CFG1.2 U5.B2 | length 308.9
  Top Layer w3.5: U5.B2@3883.16,3445.39 v1(3883.16,3473.23)
  Bottom Layer w3.5: v1(3883.16,3473.23) 4024.22,3614.29 MCU_CFG1.2@4024.22,3695.84
SPI2_SIN: MCU_CFG1.1 U5.C2 | length 352.5
  Top Layer w3.5: U5.C2@3855.32,3417.55 3855.32,3444.74 3825.22,3474.84 3825.22,3517.84 3974.22,3666.84 MCU_CFG1.1@3974.22,3695.84
SRAM-A0: U1.H1 U3.A3 | length 403.1
  Top Layer w3.5: U1.H1@5063.03,2992.13 5159.8,2895.36 5241.66,2895.36 5329.9,2807.12 5329.9,2785.76 U3.A3@5302.86,2758.72
SRAM-A1: U1.J1 U3.A4 | length 434.9
  Top Layer w3.5: U1.J1@5090.87,3019.97 5195.96,2914.88 5251.87,2914.88 5352.22,2814.53 5352.22,2766.32 U3.A4@5323.74,2737.84
SRAM-A2: U1.J4 U3.A5 | length 607.4
  Top Layer w3.5: U1.J4@5007.36,3103.48 5039.33,3103.48 5202.73,2940.08 5257.51,2940.08 5381.22,2816.36 5381.22,2753.56 U3.A5@5344.62,2716.96
SRAM-A3: U1.H3 U3.B3 | length 491.2
  Top Layer w3.5: U1.H3@5007.36,3047.81 5007.36,3024.74 5148.25,2883.84 5236.22,2883.84 5301.22,2818.84 5301.22,2779.34 5281.98,2760.1 U3.B3@5281.98,2737.84
SRAM-A4: U1.H2 U3.B4 | length 502.6
  Top Layer w3.5: U1.H2@5035.19,3019.97 5060.1,3019.97 5172.45,2907.61 5244.45,2907.61 5341.42,2810.64 5341.42,2777.04 5302.86,2738.48 U3.B4@5302.86,2716.96
SRAM-A5: U1.H4 U3.C3 | length 526
  Top Layer w3.5: U1.H4@4979.52,3075.64 v1(5007.36,3075.64) ; v1(5240.22,2716.96) U3.C3@5261.1,2716.96
  Bottom Layer w3.5: v1(5007.36,3075.64) 5046.51,3075.64 5133.22,2988.93 5133.22,2826.78 v1@5241.63,2718.37
SRAM-A6: U1.J5 U3.C4 | length 583.6
  Top Layer w3.5: U1.J5@4979.52,3131.32 v1(5007.36,3131.32) ; U3.C4@5281.98,2696.08 v1(5281.98,2716.96)
  Bottom Layer w3.5: v1(5007.36,3131.32) 5148.3,2990.38 5148.3,2867.11 5281.22,2734.19 v1@5281.22,2709.84
SRAM-A7: U1.L3 U3.D4 | length 946
  Top Layer w3.5: U1.L3@5090.87,3131.32 5124.42,3131.32 5242.91,3012.84 5257.22,3012.84 5484.22,2785.84 5484.22,2685.84 5390.35,2591.96 5322.03,2591.96 5261.1,2652.89 U3.D4@5261.1,2675.2
SRAM-A8: U1.C3 U3.H2 | length 401.3
  Top Layer w3.5: U1.C3@4868.16,2908.61 4868.16,2875.14 5109.86,2633.44 U3.H2@5135.83,2633.44
SRAM-A9: U1.B2 U3.H3 | length 403.7
  Top Layer w3.5: U1.B2@4868.16,2852.93 4868.16,2826.38 5081.98,2612.56 U3.H3@5156.71,2612.56
SRAM-A10: U1.A3 U3.H4 | length 589.3
  Top Layer w3.5: U1.A3@4812.48,2852.93 4812.48,2652.1 4872.74,2591.84 U3.H4@5175.95,2591.84
SRAM-A11: U1.B4 U3.H5 | length 766.3
  Top Layer w3.5: U1.B4@4812.48,2908.61 4812.48,2884.91 4789.88,2862.3 4789.88,2585.19 4827.22,2547.84 5175.26,2547.84 U3.H5@5198.34,2570.93
SRAM-A12: U1.B1 U3.G3 | length 372.2
  Top Layer w3.5: U1.B1@4896,2825.09 5101.26,2619.84 5141.22,2619.84 5154.83,2633.44 U3.G3@5177.59,2633.44
SRAM-A13: U1.A2 U3.G4 | length 567.9
  Top Layer w3.5: U1.A2@4840.32,2825.09 4825.22,2810 4825.22,2671.42 4896.54,2600.11 5166.49,2600.11 5178.95,2612.56 U3.G4@5198.47,2612.56
SRAM-A14: U1.G5 U3.F3 | length 563.6
  Top Layer w3.5: U1.G5@4923.84,3075.64 v1(4951.68,3075.64) ; v1(5177.59,2654.32) U3.F3@5198.47,2654.32
  Bottom Layer w3.5: v1(4951.68,3075.64) 4969.22,3058.1 4969.22,2862.68 v1(5177.59,2654.32)
SRAM-A15: U1.F4 U3.F4 | length 540.7
  Top Layer w3.5: v1(4923.84,2992.13) U1.F4@4923.84,3019.97 ; v1(5198.47,2633.44) U3.F4@5219.34,2633.44
  Bottom Layer w3.5: v1(4923.84,2992.13) 4923.84,2874.71 5165.1,2633.44 v1(5198.47,2633.44)
SRAM-A16: U1.H5 U3.E4 | length 585.2
  Top Layer w3.5: U1.H5@4951.68,3103.48 v1(4979.52,3103.48) ; U3.E4@5240.22,2654.32 v1(5240.22,2675.2)
  Bottom Layer w3.5: v1(4979.52,3103.48) 4979.52,2935.91 5167.62,2747.81 5167.62,2747.37 5176.76,2738.23 5177.2,2738.23 v1(5240.22,2675.2)
SRAM-A17: U1.E2 U3.D3 | length 388.1
  Top Layer w3.5: U1.E2@4951.68,2936.45 4975.38,2936.45 5014.99,2896.84 5017.3,2896.84 5217.07,2697.07 5239.24,2697.07 U3.D3@5240.22,2696.08
SRAM-A18: U1.C2 U3.H1 | length 325.7
  Top Layer w3.5: U1.C2@4896,2880.77 4896,2858.7 5080.14,2674.56 5094.71,2674.56 U3.H1@5114.95,2654.32
SRAM-A19: U1.C1 U3.G2 | length 315.1
  Top Layer w3.5: U1.C1@4923.84,2852.93 4998.69,2778.08 5013.81,2778.08 5137.57,2654.32 U3.G2@5156.71,2654.32
SRAM-DQ0: U1.K1 U3.B6 | length 538.8
  Top Layer w3.5: U1.K1@5118.71,3047.81 5212.21,2954.31 5258.99,2954.31 5399.22,2814.07 5399.22,2751.53 5344.62,2696.93 U3.B6@5344.62,2675.2
SRAM-DQ1: U1.K2 U3.C5 | length 686.6
  Top Layer w3.5: U1.K2@5090.87,3075.64 5114.42,3075.64 5220.66,2969.41 5257.66,2969.41 5421.22,2805.84 5421.22,2701.84 5381.22,2661.84 5336.99,2661.84 5323.63,2675.2 U3.C5@5302.86,2675.2
SRAM-DQ2: U1.K3 U3.C6 | length 750.8
  Top Layer w3.5: U1.K3@5063.03,3103.48 5096.58,3103.48 5213.95,2986.11 5252.66,2986.11 5444.22,2794.54 5444.22,2686.84 5411.71,2654.32 U3.C6@5323.74,2654.32
SRAM-DQ3: U1.L2 U3.D5 | length 784.2
  Top Layer w3.5: U1.L2@5118.71,3103.48 5140.78,3103.48 5243.43,3000.84 5253.53,3000.84 5467.22,2787.14 5467.22,2694.84 5414.22,2641.84 5315.39,2641.84 5302.9,2654.32 U3.D5@5281.98,2654.32
SRAM-DQ4: U1.A5 U3.E5 | length 1201.4
  Top Layer w3.5: U1.A5@4756.81,2908.61 4740.22,2892.03 4740.22,2453.84 4753.22,2440.84 5271.07,2440.84 5279.22,2449 5279.22,2593.84 5261.1,2611.96 U3.E5@5261.1,2633.44
SRAM-DQ5: U1.D4 U3.F5 | length 1121.3
  Top Layer w3.5: U1.D4@4868.16,2964.29 4846.09,2964.29 4756.84,2875.04 4756.84,2523.45 4788.49,2491.81 5226.19,2491.81 5255.22,2520.84 5255.22,2575.84 5240.22,2590.84 U3.F5@5240.22,2612.56
SRAM-DQ6: U1.E6 U3.F6 | length 1266.5
  Top Layer w3.5: U1.E6@4840.32,3047.81 4840.32,3019.97 4855.93,3004.36 4855.93,2985.66 4749.84,2879.57 4749.84,2481.22 4769.22,2461.84 5250.22,2461.84 5269.22,2480.84 5269.22,2583.56 U3.F6@5261.1,2591.68
SRAM-DQ7: U1.A4 U3.G6 | length 836.3
  Top Layer w3.5: U1.A4@4784.64,2880.77 4765.22,2861.35 4765.22,2563.3 4804.69,2523.84 5173.22,2523.84 5220.19,2570.81 U3.G6@5240.22,2570.81
SRAM-DQ8: U1.G1 U3.B1 | length 281.5
  Top Layer w3.5: U1.G1@5035.19,2964.29 5135.64,2863.84 5155.98,2863.84 U3.B1@5240.22,2779.6
SRAM-DQ9: U1.F3 U3.C1 | length 364.3
  Top Layer w3.5: U1.F3@4951.68,2992.13 4973.75,2992.13 5138.84,2827.03 5151.03,2827.03 U3.C1@5219.34,2758.72
SRAM-DQ10: U1.G2 U3.C2 | length 364.8
  Top Layer w3.5: U1.G2@5007.36,2992.13 5007.36,2968.42 5123.94,2851.84 5147.92,2851.84 5240.22,2759.54 U3.C2@5240.22,2737.84
SRAM-DQ11: U1.F2 U3.D2 | length 368.6
  Top Layer w3.5: U1.F2@4979.52,2964.29 4979.52,2942.22 5007.89,2913.84 5036.22,2913.84 5139.22,2810.84 5148.3,2810.84 5219.34,2739.79 U3.D2@5219.34,2716.96
SRAM-DQ12: U1.E1 U3.E2 | length 317.6
  Top Layer w3.5: U1.E1@4979.52,2908.61 5034.95,2853.18 5034.95,2835.04 5152.76,2717.23 5153.83,2717.23 5174.98,2696.08 U3.E2@5198.47,2696.08
SRAM-DQ13: U1.D3 U3.F2 | length 403.5
  Top Layer w3.5: U1.D3@4896,2936.45 4919.7,2936.45 4989.99,2866.16 4989.99,2842.77 5157.56,2675.2 U3.F2@5177.59,2675.2
SRAM-DQ14: U1.E3 U3.F1 | length 364.7
  Top Layer w3.5: U1.E3@4923.84,2964.29 4923.84,2942.22 5016.19,2849.86 5016.19,2836.6 U3.F1@5156.71,2696.08
SRAM-DQ15: U1.D1 U3.G1 | length 281.8
  Top Layer w3.5: U1.D1@4951.68,2880.77 4951.68,2859.35 U3.G1@5135.83,2675.2
SRAM_CS: R42.1 U1.J3 U3.B5 | length 573.3
  Top Layer w3.5: U1.J3@5035.19,3075.64 5057.27,3075.64 5206.07,2926.84 5256.22,2926.84 5362.22,2820.84 5362.22,2754.84 v1(5323.74,2716.36) U3.B5@5323.74,2696.08
SRAM_OE: R44.1 U1.G4 U3.A2 | length 457.4
  Top Layer w3.5: U1.G4@4951.68,3047.81 4974.39,3047.81 5148.36,2873.84 5215.06,2873.84 5281.98,2806.92 U3.A2@5281.98,2779.6
  other v1: 5258.06,2830.84
SRAM_WR: R43.1 U1.C4 U3.G5 | length 792
  Top Layer w3.5: U1.C4@4840.32,2936.45 4840.32,2902.85 4796.88,2859.4 4796.88,2618.03 4850.07,2564.84 5171.44,2564.84 v1(5198.29,2591.68) U3.G5@5219.34,2591.68
TCK: JTAG1.6 R14.1 U1.L7 | length 1854.9
  Top Layer w3.5: U1.L7@4979.52,3242.68 v1(5007.36,3242.68)
  Bottom Layer w3.5: v1(5007.36,3242.68) 5018.24,3253.57 5018.24,3284.89 5394.36,3661 5892,3661 5904,3673 5904,4117.06 5928.94,4142 6079,4142 6101.74,4164.74 6101.74,4237
TDI_FPGA: JTAG1.10 U1.N7 | length 1645.2
  Top Layer w3.5: v1(5007.36,3298.35) U1.N7@5035.19,3298.36
  Bottom Layer w3.5: v1(5007.36,3298.35) 5007.36,3320.43 5371.93,3685 5868,3685 5877,3694 5877,4130.8 5944.26,4198.06 5944.26,4237
TDO_FPGA: JTAG1.8 U1.N8 | length 1690.5
  Top Layer w3.5: U1.N8@5007.36,3326.19 v1(5035.19,3326.19)
  Bottom Layer w3.5: v1(5035.19,3326.19) 5383,3674 5881,3674 5890,3683 5890,4126 5915,4151 6002,4151 6023,4172 6023,4237
TMS: JTAG1.4 R13.1 U1.M7 | length 1738.2
  Top Layer w3.5: U1.M7@5007.36,3270.52 v1(5035.19,3270.52)
  Bottom Layer w3.5: v1(5035.19,3270.52) 5073.34,3270.52 5450.83,3648 5902,3648 5917,3663 5917,4114.17 5934.83,4132 6106,4132 6119,4145
USB0_N: R26.1 USB1.2 | length 380.8
  Bottom Layer w10: 3339.22,3618.29 3381.39,3618.29 3590.12,3409.56 3612.51,3409.56 R26.1@3627.39,3394.67
USB0_P: R27.1 USB1.3 | length 325.2
  Bottom Layer w10: 3375.82,3595.57 3574.44,3396.95 3574.44,3376.62 R27.1@3591.39,3359.67
USB0D_N: R26.2 U5.H2 | length 121.4
  Top Layer w8: v1(3679.22,3343.84) 3716.13,3306.93 U5.H2@3716.13,3278.36
  Bottom Layer w8: R26.2@3654.06,3374.01 3654.06,3369.01 v1(3679.22,3343.84)
USB0D_P: R27.2 U5.H1 | length 89.4
  Top Layer w8: v1(3639.22,3309.84) 3684.64,3309.84 U5.H1@3688.29,3306.19
  Bottom Layer w8: R27.2@3609.99,3333.01 3616.06,3333.01 v1(3639.22,3309.84)
VBUS: D1.2 F1.2 HAT1.2 HAT1.4
XADCGND: C16.2 L6.2 U1.G7 U1.H7 U1.H8 U1.J7 U1.J8 | length 150.7
  Top Layer w3.5: U1.G7@4868.16,3131.32 U1.H7@4896,3159.16 4896,3187 ; U1.H8@4868.16,3187 4896,3187 ; U1.J8@4896,3214.84 4896,3187 ; U1.J7@4923.84,3187 4896,3187
XCLK: U1.F5 Y2.3 | length 27.8
  Top Layer w3.5: v1(4868.16,3047.81) U1.F5@4896,3047.81
pads on no net: BOOT.1 BOOT.2 BOOT.3 BOOT.4 HAT1.0 JTAG1.12 LS1.0 PCAM.1 PCAM.2 PCAM.3 PCAM.4 PCAM.5 PCAM.6 PCAM.7 PCAM.8 PCAM.9 PCAM.10 PCAM.11 PCAM.12 PCAM.13 PCAM.14 PCAM.15 PCAM.16 PCAM.17 PMOD4.7 PMOD4.8 PMOD4.9 PMOD4.10 PMOD4.11 PMOD4.12 PMOD5.1 PMOD5.2 PMOD5.7 PMOD5.8 PMOD6.1 PMOD6.2 PMOD6.3 PMOD6.4 PMOD6.7 PMOD6.8 PMOD6.9 PMOD6.10 PMOD6.11 PMOD6.12 PMOD7.1 PMOD7.2 PMOD7.7 PMOD7.8 PMOD8.1 PMOD8.2 PMOD8.7 PMOD8.8 PMOD9.1 PMOD9.2 PMOD9.7 PMOD9.8 SD*1.0 U3.E3 U3.H6 U5.A10 U5.B10 U5.C10 U5.M5 USB1.0 USB1.4 USB1.6 USB1.7 XTAL1.1 Y1.1 Y2.1

## Polygon pours and split planes (outlines as drawn)
GND on GND Plane (split plane): 6260.21,4354.36 6265.56,4353.29 6270.72,4351.54 6275.61,4349.13 6280.14,4346.1 6284.24,4342.51 6287.83,4338.41 6290.86,4333.88 6293.27,4328.99 6295.03,4323.83 6296.09,4318.48 6296.41,4313.57 6296.36,4313.04 6296.36,2251.46 6296.42,2250.85 6296.07,2244.58 6294.91,2237.78 6293,2231.16 6290.37,2224.79 6287.03,2218.76 6283.05,2213.14 6278.45,2208 6273.32,2203.41 6267.7,2199.42 6261.66,2196.09 6255.3,2193.45 6248.67,2191.54 6241.88,2190.39 6235.6,2190.04 6235,2190.1 3030,2190.1 3029.5,2190.05 3024.78,2190.36 3019.65,2191.38 3014.7,2193.06 3010.01,2195.37 3005.66,2198.28 3001.73,2201.73 2998.28,2205.66 2995.37,2210.01 2993.06,2214.7 2991.38,2219.65 2990.36,2224.78 2990.05,2229.5 2990.1,2230 2990.1,4304.5 2990.05,4304.99 2990.34,4310.12 2991.28,4315.67 2992.84,4321.08 2994.99,4326.28 2997.72,4331.21 3000.97,4335.8 3004.73,4340 3008.92,4343.75 3013.51,4347.01 3018.44,4349.73 3023.64,4351.89 3029.05,4353.44 3034.6,4354.39 3039.73,4354.68 3040.22,4354.63 6254.78,4354.63 6255.3,4354.68
3V3 on 3V3 Plane (split plane): 6260.21,4354.36 6265.56,4353.29 6270.72,4351.54 6275.61,4349.13 6280.14,4346.1 6284.24,4342.51 6287.83,4338.41 6290.86,4333.88 6293.27,4328.99 6295.03,4323.83 6296.09,4318.48 6296.41,4313.57 6296.36,4313.04 6296.36,2251.46 6296.42,2250.85 6296.07,2244.58 6294.91,2237.78 6293,2231.16 6290.37,2224.79 6287.03,2218.76 6283.05,2213.14 6278.45,2208 6273.32,2203.41 6267.7,2199.42 6261.66,2196.09 6255.3,2193.45 6248.67,2191.54 6241.88,2190.39 6235.6,2190.04 6235,2190.1 3030,2190.1 3029.5,2190.05 3024.78,2190.36 3019.65,2191.38 3014.7,2193.06 3010.01,2195.37 3005.66,2198.28 3001.73,2201.73 2998.28,2205.66 2995.37,2210.01 2993.06,2214.7 2991.38,2219.65 2990.36,2224.78 2990.05,2229.5 2990.1,2230 2990.1,4304.5 2990.05,4304.99 2990.34,4310.12 2991.28,4315.67 2992.84,4321.08 2994.99,4326.28 2997.72,4331.21 3000.97,4335.8 3004.73,4340 3008.92,4343.75 3013.51,4347.01 3018.44,4349.73 3023.64,4351.89 3029.05,4353.44 3034.6,4354.39 3039.73,4354.68 3040.22,4354.63 6254.78,4354.63 6255.3,4354.68

## Keep-outs
Keep-Out Layer:
  lines w10: 3030,2170 cw(c3030,2230) 2970,2230 2970,4304.5 cw(c3040.22,4304.5) 3040.22,4374.72 6254.78,4374.72 cw(c6254.78,4313.04) 6316.46,4313.04 6316.46,2251.46 cw(c6235,2251.46) 6235,2170 ; 3110.22,2169.84 6230,2169.84

## Text inside footprints (layer, text, board x,y; h text height)
LS1: Top Overlay "+" at 5312.5,3918.48 h30
PCAM: Top Overlay "1" at 5205.36,1666.28 h59.06; Top Overlay "15" at 5447.49,1666.28 h59.06